# EAGLE board Board Controller (EAGLE 9.6.2)
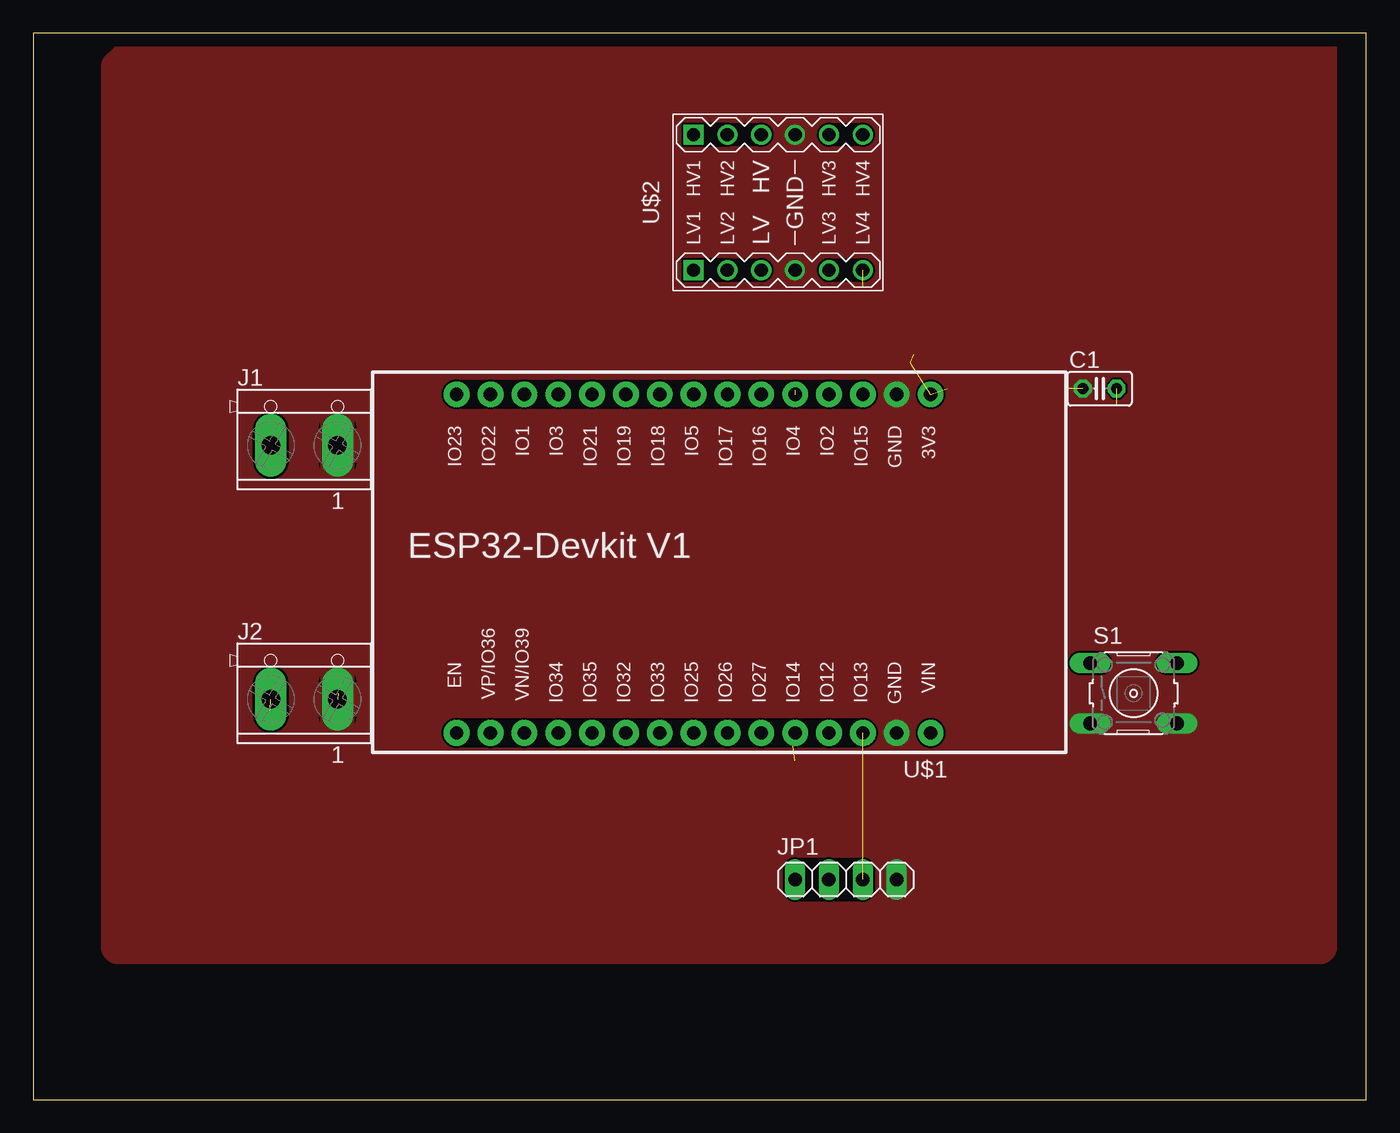
[diagram p0: board, top side]
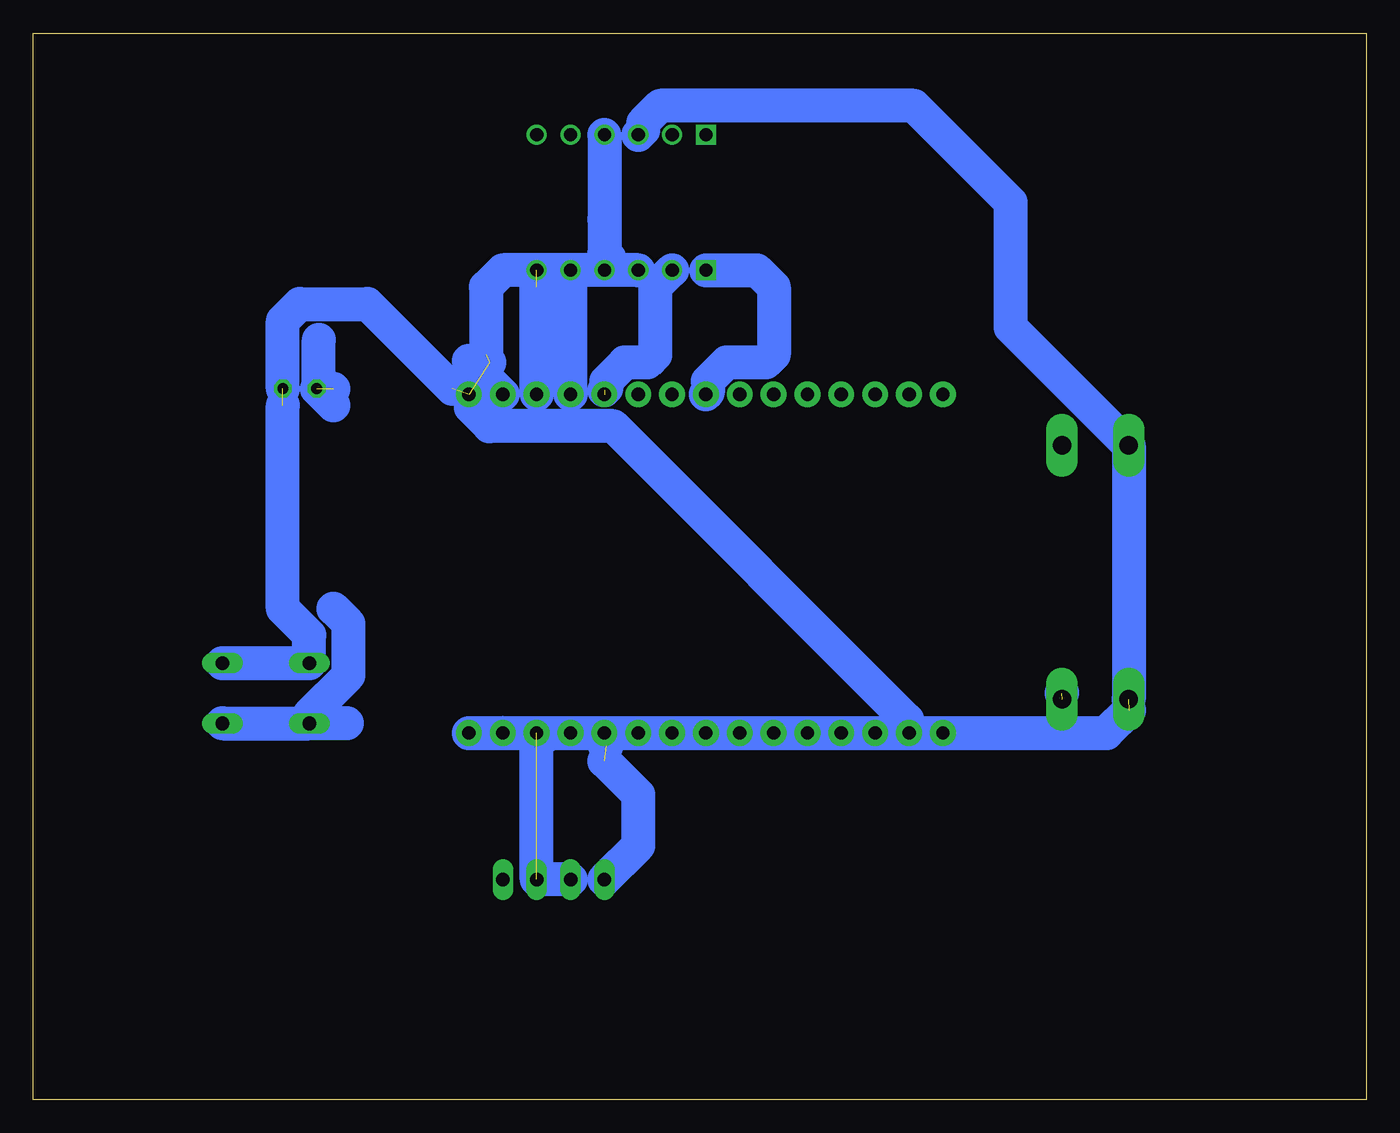
[diagram p1: board, bottom side, seen from below]

Size 100 x 80 mm. Coordinates in mm from the lower left corner, seen from the top.
Outline: 0,0 100,0 100,80 0,80 0,0
Copper layers (1*16): Top 0.035mm / dielectric 1.5mm / Bottom 0.035mm
Design rules "default": minimum track width 6mil, minimum drill 0.35mm, track to track 6mil, track to pad 6mil, pad to pad 6mil, via to via 6mil, smd to smd 6mil, copper to edge 40mil, drill to drill 6mil, minimum pad ring 10mil, minimum via ring 8mil, stop-mask expansion 4mil, vias tented up to drill 0mil, thermal gap 10mil

## Footprints (pad centres in the part's own frame; a part is rotated, then mirrored left to right if it is on the bottom)
C025-025X050 = drill 0.813 octagon: 1 -1.27,0; 2 1.27,0
TERMINAL_BLOCK_2P_5 = drill 1.4 pad 2.38 long: 1 2.5,-0.45; 2 -2.5,-0.45
1X04 = drill 1.016 long: 1 -3.81,0; 2 -1.27,0; 3 1.27,0; 4 3.81,0
B3F-10XX = drill 1.016 long: 1 -3.251,2.261; 2 3.251,2.261; 3 -3.251,-2.261; 4 3.251,-2.261
ESP32-DEVKITV1 = drill 1 pad 1.93: 3V3 -16.52,-12.27; D1 13.96,-12.27; D2 -8.9,-12.27; D3 11.42,-12.27; D4 -6.36,-12.27; D5 1.26,-12.27; D12 -8.9,13.135; D13 -11.44,13.135; D14 -6.36,13.135; D15 -11.44,-12.27; D16 -3.82,-12.27; D17 -1.28,-12.27; D18 3.8,-12.27; D19 6.34,-12.27; D21 8.88,-12.27; D22 16.5,-12.27; D23 19.04,-12.27; D25 1.26,13.135; D26 -1.28,13.135; D27 -3.82,13.135; D32 6.34,13.135; D33 3.8,13.135; D34 11.42,13.135; D35 8.88,13.135; D36 16.5,13.135; D39 13.96,13.135; EN 19.04,13.135; GND@1 -13.98,13.135; GND@2 -13.98,-12.27; VIN -16.52,13.135
LEVEL-SHIFTER-4CH = drill 1 square: J1.1 -5.08,6.35; J2.1 5.08,6.35 | drill 1: J1.2 -5.08,3.81; J1.3 -5.08,1.27; J1.4 -5.08,-1.27; J1.5 -5.08,-3.81; J1.6 -5.08,-6.35; J2.2 5.08,3.81; J2.3 5.08,1.27; J2.4 5.08,-1.27; J2.5 5.08,-3.81; J2.6 5.08,-6.35

## Placement (x,y rotation side)
C1  [C025-025X050]  80.01,53.34 0 top
J1  CON_TERMINAL_BLOCK_02-5MM  [TERMINAL_BLOCK_2P_5]  20.32,49.53 0 top
J2  CON_TERMINAL_BLOCK_02-5MM  [TERMINAL_BLOCK_2P_5]  20.32,30.48 0 top
JP1  [1X04]  60.96,16.51 0 top
S1  [B3F-10XX]  82.55,30.48 0 top
U$1  ESP32DEVKITV1  [ESP32-DEVKITV1]  50.8,40.64 180 top
U$2  LEVEL-SHIFTER-4CH  [LEVEL-SHIFTER-4CH]  55.88,67.31 90 top

## Library data of the parts
C1 = rcl; SPICEPREFIX: C
J1 J2 = tblok
JP1 = pinhead
S1 = switch-omron; MPN: B3F-1000; OC_FARNELL: 176432; OC_NEWARK: 36M3542
U$1 = esp32-devkitv1
U$2 = diy-model

## Nets
GND: C1.1 J1.1 J2.1 JP1.4 S1.3 S1.4 U$1.GND@1 U$1.GND@2 U$2.J1.4 U$2.J2.4
HV: J1.2 J2.2 U$1.VIN U$2.J2.3
LV: C1.2 S1.1 S1.2 U$1.3V3 U$1.D36 U$2.J1.3
LV1: U$1.D5 U$2.J1.1
LV2: U$1.D4 U$2.J1.2
LV3: U$1.D2 U$2.J1.5
LV4: U$1.D15 U$2.J1.6
OUT1: JP1.1 U$1.D14
OUT2: JP1.2 U$1.D12
OUT3: JP1.3 U$1.D13

## Tracks (layer width: path | path; a pad name or v marks a point on that pad's centre or on a via)
GND  (2 unrouted)
  Bottom 2.54: 22.82,30.52 22.86,30.48 | 76.48,28.22 S1.3 | 64.77,27.5 U$1.GND@1 | S1.4 S1.3 | S1.3 79.3,28.89 76.35,31.84 76.35,35.71 77.47,36.83 | 77.47,53.34 78.59,53.34 78.59,57 | 56.79,63.13 56.79,63.11 | 56.79,63.11 57.15,62.75 | U$2.J2.4 57.15,66.04 57.15,63.47 56.79,63.11 | U$1.GND@2 67.31,55.44 | C1.1 77.47,52.07
  pour Top: 6.35,77.47 7.62,78.74 96.52,78.74 96.52,11.43 6.35,11.43
HV  (1 unrouted)
  Bottom 2.54: J2.2 J1.2 26.67,57.93 26.67,67.31 33.93,74.57 52.97,74.57 54.25,73.29 54.25,72.75 U$2.J2.3 | U$1.VIN 19.48,27.5 17.78,29.21
LV  (4 unrouted)
  Bottom 2.54: C1.2 81.28,58.42 80.01,59.69 74.93,59.69 68.58,53.34 | S1.2 S1.1 79.3,34.85 81.28,36.83 81.28,52.07 | U$1.D36 34.45,27.66 34.45,28.49 56.48,50.52 65.77,50.52 67.17,51.92 67.17,53.9 65.77,55.3 | U$2.J1.3 64.77,62.23 66.04,60.96 66.04,55.88
LV1
  Bottom 2.54: U$2.J1.1 45.72,62.23 44.45,60.96 44.45,55.88 45.03,55.3 47.99,55.3 49.39,53.9 49.39,53.06 U$1.D5
LV2  (1 unrouted)
  Bottom 2.54: U$2.J1.2 53.34,60.96 53.34,55.88 53.92,55.3 55.61,55.3 57.01,53.9 57.01,53.37 57.16,53.22
LV3
  Bottom 2.54: U$1.D2 U$2.J1.5
LV4  (1 unrouted)
  Bottom 2.54: U$1.D15 62.23,60.96
OUT1  (1 unrouted)
  Bottom 2.54: JP1.1 54.61,19.05 54.61,22.86 57.15,25.4 | 57.01,26.52 57.01,26.53 | 57.15,26.67 57.01,26.53 | 57.01,26.53 57.01,27.35 U$1.D14
OUT2
  Bottom 2.54: JP1.2 62.23,16.51 62.23,26.67 61.4,27.5 U$1.D12
OUT3  (1 unrouted)